# EAGLE board ai_breakout_ws2812b_panel (EAGLE 6.5.0), part 1 of 2
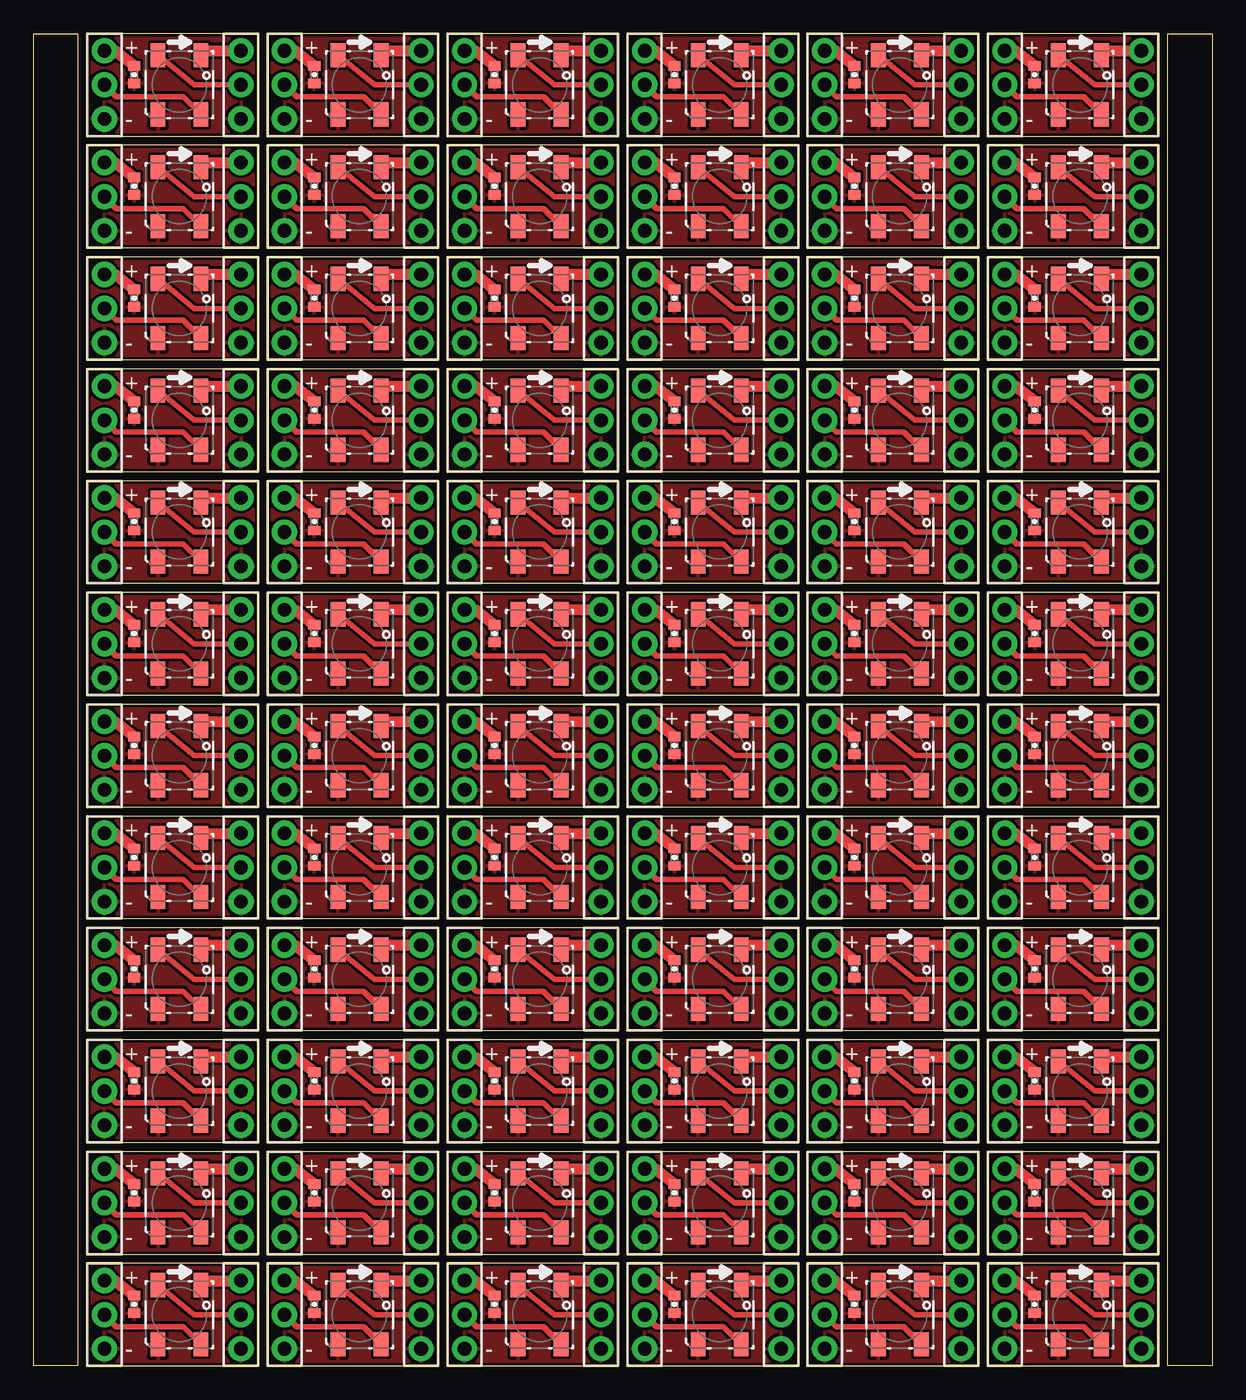
[diagram p0: board, top side]
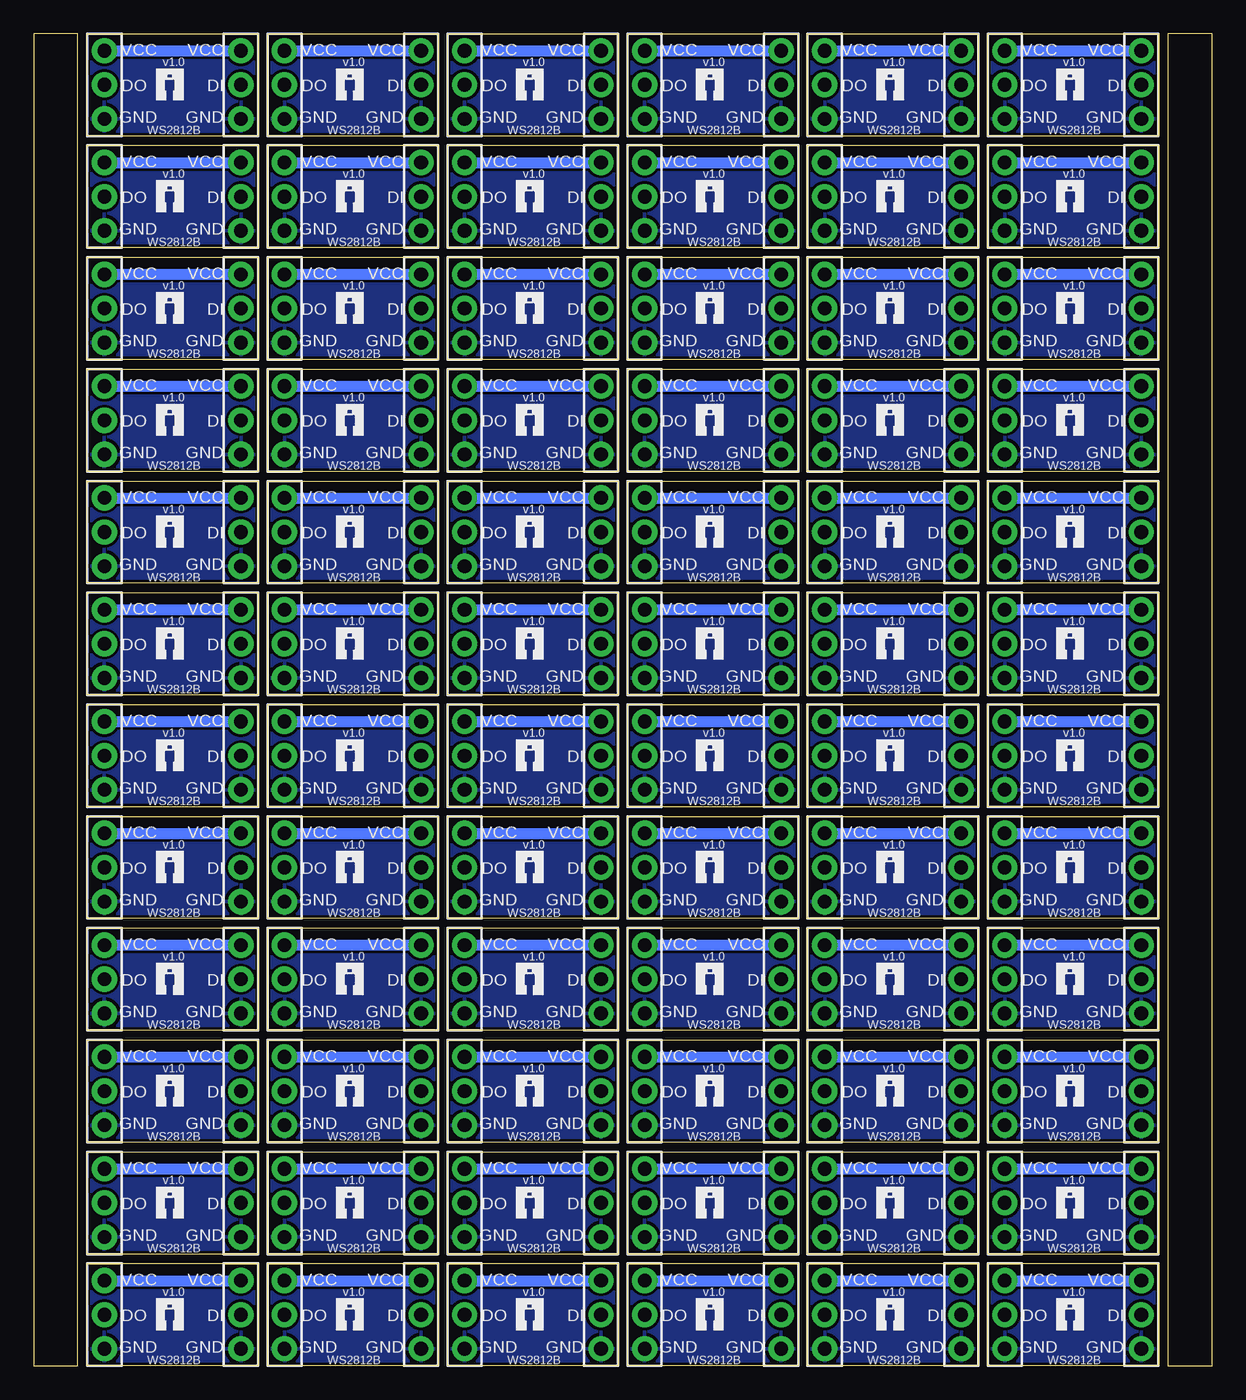
[diagram p1: board, bottom side, seen from below]

Size 87.7 x 99.14 mm. Coordinates in mm from the lower left corner, seen from the top.
Outline: 296 segments
Copper layers (1*16): Top 0.035mm / dielectric 1.5mm / Bottom 0.035mm
Design rules "ai_2layer": minimum track width 7mil, minimum drill 15mil, track to track 8mil, track to pad 8mil, pad to pad 8mil, via to via 8mil, smd to smd 8mil, copper to edge 8mil, drill to drill 8mil, minimum pad ring 12mil, minimum via ring 10mil, stop-mask expansion 4mil, vias tented up to drill 20mil, thermal gap 10mil

## Footprints (pad centres in the part's own frame; a part is rotated, then mirrored left to right if it is on the bottom)
CAP-0402 = smd 0.7 x 0.9: 1 -0.65,0; 2 0.65,0
1X03 = drill 1.016 pad 1.88: 1 -2.54,0; 2 0,0; 3 2.54,0
1X03-NOFIRST = drill 1.016 pad 1.88: 1 -2.54,0; 2 0,0; 3 2.54,0
LED-WS2812B-SM = smd 1.8 x 1.1: 1 -2.2,1.6; 2 -2.2,-1.6; 3 2.2,-1.6; 4 2.2,1.6

## Placement (x,y rotation side)
C1  0.1uF  [CAP-0402]  7.49,4.57 270 top
C2  0.1uF  [CAP-0402]  7.49,12.89 270 top
C3  0.1uF  [CAP-0402]  7.49,21.21 270 top
C4  0.1uF  [CAP-0402]  7.49,29.53 270 top
C5  0.1uF  [CAP-0402]  7.49,37.85 270 top
C6  0.1uF  [CAP-0402]  7.49,46.17 270 top
C7  0.1uF  [CAP-0402]  7.49,54.49 270 top
C8  0.1uF  [CAP-0402]  7.49,62.81 270 top
C9  0.1uF  [CAP-0402]  7.49,71.13 270 top
C10  0.1uF  [CAP-0402]  7.49,79.45 270 top
C11  0.1uF  [CAP-0402]  7.49,87.77 270 top
C12  0.1uF  [CAP-0402]  7.49,96.09 270 top
C13  0.1uF  [CAP-0402]  20.89,4.57 270 top
C14  0.1uF  [CAP-0402]  20.89,12.89 270 top
C15  0.1uF  [CAP-0402]  20.89,21.21 270 top
C16  0.1uF  [CAP-0402]  20.89,29.53 270 top
C17  0.1uF  [CAP-0402]  20.89,37.85 270 top
C18  0.1uF  [CAP-0402]  20.89,46.17 270 top
C19  0.1uF  [CAP-0402]  20.89,54.49 270 top
C20  0.1uF  [CAP-0402]  20.89,62.81 270 top
C21  0.1uF  [CAP-0402]  20.89,71.13 270 top
C22  0.1uF  [CAP-0402]  20.89,79.45 270 top
C23  0.1uF  [CAP-0402]  20.89,87.77 270 top
C24  0.1uF  [CAP-0402]  20.89,96.09 270 top
C25  0.1uF  [CAP-0402]  34.29,4.57 270 top
C26  0.1uF  [CAP-0402]  34.29,12.89 270 top
C27  0.1uF  [CAP-0402]  34.29,21.21 270 top
C28  0.1uF  [CAP-0402]  34.29,29.53 270 top
C29  0.1uF  [CAP-0402]  34.29,37.85 270 top
C30  0.1uF  [CAP-0402]  34.29,46.17 270 top
C31  0.1uF  [CAP-0402]  34.29,54.49 270 top
C32  0.1uF  [CAP-0402]  34.29,62.81 270 top
C33  0.1uF  [CAP-0402]  34.29,71.13 270 top
C34  0.1uF  [CAP-0402]  34.29,79.45 270 top
C35  0.1uF  [CAP-0402]  34.29,87.77 270 top
C36  0.1uF  [CAP-0402]  34.29,96.09 270 top
C37  0.1uF  [CAP-0402]  47.69,4.57 270 top
C38  0.1uF  [CAP-0402]  47.69,12.89 270 top
C39  0.1uF  [CAP-0402]  47.69,21.21 270 top
C40  0.1uF  [CAP-0402]  47.69,29.53 270 top
C41  0.1uF  [CAP-0402]  47.69,37.85 270 top
C42  0.1uF  [CAP-0402]  47.69,46.17 270 top
C43  0.1uF  [CAP-0402]  47.69,54.49 270 top
C44  0.1uF  [CAP-0402]  47.69,62.81 270 top
C45  0.1uF  [CAP-0402]  47.69,71.13 270 top
C46  0.1uF  [CAP-0402]  47.69,79.45 270 top
C47  0.1uF  [CAP-0402]  47.69,87.77 270 top
C48  0.1uF  [CAP-0402]  47.69,96.09 270 top
C49  0.1uF  [CAP-0402]  61.09,4.57 270 top
C50  0.1uF  [CAP-0402]  61.09,12.89 270 top
C51  0.1uF  [CAP-0402]  61.09,21.21 270 top
C52  0.1uF  [CAP-0402]  61.09,29.53 270 top
C53  0.1uF  [CAP-0402]  61.09,37.85 270 top
C54  0.1uF  [CAP-0402]  61.09,46.17 270 top
C55  0.1uF  [CAP-0402]  61.09,54.49 270 top
C56  0.1uF  [CAP-0402]  61.09,62.81 270 top
C57  0.1uF  [CAP-0402]  61.09,71.13 270 top
C58  0.1uF  [CAP-0402]  61.09,79.45 270 top
C59  0.1uF  [CAP-0402]  61.09,87.77 270 top
C60  0.1uF  [CAP-0402]  61.09,96.09 270 top
C61  0.1uF  [CAP-0402]  74.49,4.57 270 top
C62  0.1uF  [CAP-0402]  74.49,12.89 270 top
C63  0.1uF  [CAP-0402]  74.49,21.21 270 top
C64  0.1uF  [CAP-0402]  74.49,29.53 270 top
C65  0.1uF  [CAP-0402]  74.49,37.85 270 top
C66  0.1uF  [CAP-0402]  74.49,46.17 270 top
C67  0.1uF  [CAP-0402]  74.49,54.49 270 top
C68  0.1uF  [CAP-0402]  74.49,62.81 270 top
C69  0.1uF  [CAP-0402]  74.49,71.13 270 top
C70  0.1uF  [CAP-0402]  74.49,79.45 270 top
C71  0.1uF  [CAP-0402]  74.49,87.77 270 top
C72  0.1uF  [CAP-0402]  74.49,96.09 270 top
IN  1X03  [1X03]  5.27,3.81 90 top
IN1  1X03  [1X03]  5.27,12.13 90 top
IN2  1X03  [1X03]  5.27,20.45 90 top
IN3  1X03  [1X03]  5.27,28.77 90 top
IN4  1X03  [1X03]  5.27,37.09 90 top
IN5  1X03  [1X03]  5.27,45.41 90 top
IN6  1X03  [1X03]  5.27,53.73 90 top
IN7  1X03  [1X03]  5.27,62.05 90 top
IN8  1X03  [1X03]  5.27,70.37 90 top
IN9  1X03  [1X03]  5.27,78.69 90 top
IN10  1X03  [1X03]  5.27,87.01 90 top
IN11  1X03  [1X03]  5.27,95.33 90 top
IN12  1X03  [1X03]  18.67,3.81 90 top
IN13  1X03  [1X03]  18.67,12.13 90 top
IN14  1X03  [1X03]  18.67,20.45 90 top
IN15  1X03  [1X03]  18.67,28.77 90 top
IN16  1X03  [1X03]  18.67,37.09 90 top
IN17  1X03  [1X03]  18.67,45.41 90 top
IN18  1X03  [1X03]  18.67,53.73 90 top
IN19  1X03  [1X03]  18.67,62.05 90 top
IN20  1X03  [1X03]  18.67,70.37 90 top
IN21  1X03  [1X03]  18.67,78.69 90 top
IN22  1X03  [1X03]  18.67,87.01 90 top
IN23  1X03  [1X03]  18.67,95.33 90 top
IN24  1X03  [1X03]  32.07,3.81 90 top
IN25  1X03  [1X03]  32.07,12.13 90 top
IN26  1X03  [1X03]  32.07,20.45 90 top
IN27  1X03  [1X03]  32.07,28.77 90 top
IN28  1X03  [1X03]  32.07,37.09 90 top
IN29  1X03  [1X03]  32.07,45.41 90 top
IN30  1X03  [1X03]  32.07,53.73 90 top
IN31  1X03  [1X03]  32.07,62.05 90 top
IN32  1X03  [1X03]  32.07,70.37 90 top
IN33  1X03  [1X03]  32.07,78.69 90 top
IN34  1X03  [1X03]  32.07,87.01 90 top
IN35  1X03  [1X03]  32.07,95.33 90 top
IN36  1X03  [1X03]  45.47,3.81 90 top
IN37  1X03  [1X03]  45.47,12.13 90 top
IN38  1X03  [1X03]  45.47,20.45 90 top
IN39  1X03  [1X03]  45.47,28.77 90 top
IN40  1X03  [1X03]  45.47,37.09 90 top
IN41  1X03  [1X03]  45.47,45.41 90 top
IN42  1X03  [1X03]  45.47,53.73 90 top
IN43  1X03  [1X03]  45.47,62.05 90 top
IN44  1X03  [1X03]  45.47,70.37 90 top
IN45  1X03  [1X03]  45.47,78.69 90 top
IN46  1X03  [1X03]  45.47,87.01 90 top
IN47  1X03  [1X03]  45.47,95.33 90 top
IN48  1X03  [1X03]  58.87,3.81 90 top
IN49  1X03  [1X03]  58.87,12.13 90 top
IN50  1X03  [1X03]  58.87,20.45 90 top
IN51  1X03  [1X03]  58.87,28.77 90 top
IN52  1X03  [1X03]  58.87,37.09 90 top
IN53  1X03  [1X03]  58.87,45.41 90 top
IN54  1X03  [1X03]  58.87,53.73 90 top
IN55  1X03  [1X03]  58.87,62.05 90 top
IN56  1X03  [1X03]  58.87,70.37 90 top
IN57  1X03  [1X03]  58.87,78.69 90 top
IN58  1X03  [1X03]  58.87,87.01 90 top
IN59  1X03  [1X03]  58.87,95.33 90 top
IN60  1X03  [1X03]  72.27,3.81 90 top
IN61  1X03  [1X03]  72.27,12.13 90 top
IN62  1X03  [1X03]  72.27,20.45 90 top
IN63  1X03  [1X03]  72.27,28.77 90 top
IN64  1X03  [1X03]  72.27,37.09 90 top
IN65  1X03  [1X03]  72.27,45.41 90 top
IN66  1X03  [1X03]  72.27,53.73 90 top
IN67  1X03  [1X03]  72.27,62.05 90 top
IN68  1X03  [1X03]  72.27,70.37 90 top
IN69  1X03  [1X03]  72.27,78.69 90 top
IN70  1X03  [1X03]  72.27,87.01 90 top
IN71  1X03  [1X03]  72.27,95.33 90 top
OUT  1X03NOFIRST  [1X03-NOFIRST]  15.43,3.81 90 top
OUT1  1X03NOFIRST  [1X03-NOFIRST]  15.43,12.13 90 top
OUT2  1X03NOFIRST  [1X03-NOFIRST]  15.43,20.45 90 top
OUT3  1X03NOFIRST  [1X03-NOFIRST]  15.43,28.77 90 top
OUT4  1X03NOFIRST  [1X03-NOFIRST]  15.43,37.09 90 top
OUT5  1X03NOFIRST  [1X03-NOFIRST]  15.43,45.41 90 top
OUT6  1X03NOFIRST  [1X03-NOFIRST]  15.43,53.73 90 top
OUT7  1X03NOFIRST  [1X03-NOFIRST]  15.43,62.05 90 top
OUT8  1X03NOFIRST  [1X03-NOFIRST]  15.43,70.37 90 top
OUT9  1X03NOFIRST  [1X03-NOFIRST]  15.43,78.69 90 top
OUT10  1X03NOFIRST  [1X03-NOFIRST]  15.43,87.01 90 top
OUT11  1X03NOFIRST  [1X03-NOFIRST]  15.43,95.33 90 top
OUT12  1X03NOFIRST  [1X03-NOFIRST]  28.83,3.81 90 top
OUT13  1X03NOFIRST  [1X03-NOFIRST]  28.83,12.13 90 top
OUT14  1X03NOFIRST  [1X03-NOFIRST]  28.83,20.45 90 top
OUT15  1X03NOFIRST  [1X03-NOFIRST]  28.83,28.77 90 top
OUT16  1X03NOFIRST  [1X03-NOFIRST]  28.83,37.09 90 top
OUT17  1X03NOFIRST  [1X03-NOFIRST]  28.83,45.41 90 top
OUT18  1X03NOFIRST  [1X03-NOFIRST]  28.83,53.73 90 top
OUT19  1X03NOFIRST  [1X03-NOFIRST]  28.83,62.05 90 top
OUT20  1X03NOFIRST  [1X03-NOFIRST]  28.83,70.37 90 top
OUT21  1X03NOFIRST  [1X03-NOFIRST]  28.83,78.69 90 top
OUT22  1X03NOFIRST  [1X03-NOFIRST]  28.83,87.01 90 top
OUT23  1X03NOFIRST  [1X03-NOFIRST]  28.83,95.33 90 top
OUT24  1X03NOFIRST  [1X03-NOFIRST]  42.23,3.81 90 top
OUT25  1X03NOFIRST  [1X03-NOFIRST]  42.23,12.13 90 top
OUT26  1X03NOFIRST  [1X03-NOFIRST]  42.23,20.45 90 top
OUT27  1X03NOFIRST  [1X03-NOFIRST]  42.23,28.77 90 top
OUT28  1X03NOFIRST  [1X03-NOFIRST]  42.23,37.09 90 top
OUT29  1X03NOFIRST  [1X03-NOFIRST]  42.23,45.41 90 top
OUT30  1X03NOFIRST  [1X03-NOFIRST]  42.23,53.73 90 top
OUT31  1X03NOFIRST  [1X03-NOFIRST]  42.23,62.05 90 top
OUT32  1X03NOFIRST  [1X03-NOFIRST]  42.23,70.37 90 top
OUT33  1X03NOFIRST  [1X03-NOFIRST]  42.23,78.69 90 top
OUT34  1X03NOFIRST  [1X03-NOFIRST]  42.23,87.01 90 top
OUT35  1X03NOFIRST  [1X03-NOFIRST]  42.23,95.33 90 top
OUT36  1X03NOFIRST  [1X03-NOFIRST]  55.63,3.81 90 top
OUT37  1X03NOFIRST  [1X03-NOFIRST]  55.63,12.13 90 top
OUT38  1X03NOFIRST  [1X03-NOFIRST]  55.63,20.45 90 top
OUT39  1X03NOFIRST  [1X03-NOFIRST]  55.63,28.77 90 top
OUT40  1X03NOFIRST  [1X03-NOFIRST]  55.63,37.09 90 top
OUT41  1X03NOFIRST  [1X03-NOFIRST]  55.63,45.41 90 top
OUT42  1X03NOFIRST  [1X03-NOFIRST]  55.63,53.73 90 top
OUT43  1X03NOFIRST  [1X03-NOFIRST]  55.63,62.05 90 top
OUT44  1X03NOFIRST  [1X03-NOFIRST]  55.63,70.37 90 top
OUT45  1X03NOFIRST  [1X03-NOFIRST]  55.63,78.69 90 top
OUT46  1X03NOFIRST  [1X03-NOFIRST]  55.63,87.01 90 top
OUT47  1X03NOFIRST  [1X03-NOFIRST]  55.63,95.33 90 top
OUT48  1X03NOFIRST  [1X03-NOFIRST]  69.03,3.81 90 top
OUT49  1X03NOFIRST  [1X03-NOFIRST]  69.03,12.13 90 top
OUT50  1X03NOFIRST  [1X03-NOFIRST]  69.03,20.45 90 top
OUT51  1X03NOFIRST  [1X03-NOFIRST]  69.03,28.77 90 top
OUT52  1X03NOFIRST  [1X03-NOFIRST]  69.03,37.09 90 top
OUT53  1X03NOFIRST  [1X03-NOFIRST]  69.03,45.41 90 top
OUT54  1X03NOFIRST  [1X03-NOFIRST]  69.03,53.73 90 top
OUT55  1X03NOFIRST  [1X03-NOFIRST]  69.03,62.05 90 top
OUT56  1X03NOFIRST  [1X03-NOFIRST]  69.03,70.37 90 top
OUT57  1X03NOFIRST  [1X03-NOFIRST]  69.03,78.69 90 top
OUT58  1X03NOFIRST  [1X03-NOFIRST]  69.03,87.01 90 top
OUT59  1X03NOFIRST  [1X03-NOFIRST]  69.03,95.33 90 top
OUT60  1X03NOFIRST  [1X03-NOFIRST]  82.43,3.81 90 top
OUT61  1X03NOFIRST  [1X03-NOFIRST]  82.43,12.13 90 top
OUT62  1X03NOFIRST  [1X03-NOFIRST]  82.43,20.45 90 top
OUT63  1X03NOFIRST  [1X03-NOFIRST]  82.43,28.77 90 top
OUT64  1X03NOFIRST  [1X03-NOFIRST]  82.43,37.09 90 top
OUT65  1X03NOFIRST  [1X03-NOFIRST]  82.43,45.41 90 top
OUT66  1X03NOFIRST  [1X03-NOFIRST]  82.43,53.73 90 top
OUT67  1X03NOFIRST  [1X03-NOFIRST]  82.43,62.05 90 top
OUT68  1X03NOFIRST  [1X03-NOFIRST]  82.43,70.37 90 top
OUT69  1X03NOFIRST  [1X03-NOFIRST]  82.43,78.69 90 top
OUT70  1X03NOFIRST  [1X03-NOFIRST]  82.43,87.01 90 top
OUT71  1X03NOFIRST  [1X03-NOFIRST]  82.43,95.33 90 top
RGB  LED-WS2812B-SM  [LED-WS2812B-SM]  10.86,3.81 270 top
RGB1  LED-WS2812B-SM  [LED-WS2812B-SM]  10.86,12.13 270 top
RGB2  LED-WS2812B-SM  [LED-WS2812B-SM]  10.86,20.45 270 top
RGB3  LED-WS2812B-SM  [LED-WS2812B-SM]  10.86,28.77 270 top
RGB4  LED-WS2812B-SM  [LED-WS2812B-SM]  10.86,37.09 270 top
RGB5  LED-WS2812B-SM  [LED-WS2812B-SM]  10.86,45.41 270 top
RGB6  LED-WS2812B-SM  [LED-WS2812B-SM]  10.86,53.73 270 top
RGB7  LED-WS2812B-SM  [LED-WS2812B-SM]  10.86,62.05 270 top
RGB8  LED-WS2812B-SM  [LED-WS2812B-SM]  10.86,70.37 270 top
RGB9  LED-WS2812B-SM  [LED-WS2812B-SM]  10.86,78.69 270 top
RGB10  LED-WS2812B-SM  [LED-WS2812B-SM]  10.86,87.01 270 top
RGB11  LED-WS2812B-SM  [LED-WS2812B-SM]  10.86,95.33 270 top
RGB12  LED-WS2812B-SM  [LED-WS2812B-SM]  24.26,3.81 270 top
RGB13  LED-WS2812B-SM  [LED-WS2812B-SM]  24.26,12.13 270 top
RGB14  LED-WS2812B-SM  [LED-WS2812B-SM]  24.26,20.45 270 top
RGB15  LED-WS2812B-SM  [LED-WS2812B-SM]  24.26,28.77 270 top
RGB16  LED-WS2812B-SM  [LED-WS2812B-SM]  24.26,37.09 270 top
RGB17  LED-WS2812B-SM  [LED-WS2812B-SM]  24.26,45.41 270 top
RGB18  LED-WS2812B-SM  [LED-WS2812B-SM]  24.26,53.73 270 top
RGB19  LED-WS2812B-SM  [LED-WS2812B-SM]  24.26,62.05 270 top
RGB20  LED-WS2812B-SM  [LED-WS2812B-SM]  24.26,70.37 270 top
RGB21  LED-WS2812B-SM  [LED-WS2812B-SM]  24.26,78.69 270 top
RGB22  LED-WS2812B-SM  [LED-WS2812B-SM]  24.26,87.01 270 top
RGB23  LED-WS2812B-SM  [LED-WS2812B-SM]  24.26,95.33 270 top
RGB24  LED-WS2812B-SM  [LED-WS2812B-SM]  37.66,3.81 270 top
RGB25  LED-WS2812B-SM  [LED-WS2812B-SM]  37.66,12.13 270 top
RGB26  LED-WS2812B-SM  [LED-WS2812B-SM]  37.66,20.45 270 top
RGB27  LED-WS2812B-SM  [LED-WS2812B-SM]  37.66,28.77 270 top
RGB28  LED-WS2812B-SM  [LED-WS2812B-SM]  37.66,37.09 270 top
RGB29  LED-WS2812B-SM  [LED-WS2812B-SM]  37.66,45.41 270 top
RGB30  LED-WS2812B-SM  [LED-WS2812B-SM]  37.66,53.73 270 top
RGB31  LED-WS2812B-SM  [LED-WS2812B-SM]  37.66,62.05 270 top
RGB32  LED-WS2812B-SM  [LED-WS2812B-SM]  37.66,70.37 270 top
RGB33  LED-WS2812B-SM  [LED-WS2812B-SM]  37.66,78.69 270 top
RGB34  LED-WS2812B-SM  [LED-WS2812B-SM]  37.66,87.01 270 top
RGB35  LED-WS2812B-SM  [LED-WS2812B-SM]  37.66,95.33 270 top
RGB36  LED-WS2812B-SM  [LED-WS2812B-SM]  51.06,3.81 270 top
RGB37  LED-WS2812B-SM  [LED-WS2812B-SM]  51.06,12.13 270 top
RGB38  LED-WS2812B-SM  [LED-WS2812B-SM]  51.06,20.45 270 top
RGB39  LED-WS2812B-SM  [LED-WS2812B-SM]  51.06,28.77 270 top
RGB40  LED-WS2812B-SM  [LED-WS2812B-SM]  51.06,37.09 270 top
RGB41  LED-WS2812B-SM  [LED-WS2812B-SM]  51.06,45.41 270 top
RGB42  LED-WS2812B-SM  [LED-WS2812B-SM]  51.06,53.73 270 top
RGB43  LED-WS2812B-SM  [LED-WS2812B-SM]  51.06,62.05 270 top
RGB44  LED-WS2812B-SM  [LED-WS2812B-SM]  51.06,70.37 270 top
RGB45  LED-WS2812B-SM  [LED-WS2812B-SM]  51.06,78.69 270 top
RGB46  LED-WS2812B-SM  [LED-WS2812B-SM]  51.06,87.01 270 top
RGB47  LED-WS2812B-SM  [LED-WS2812B-SM]  51.06,95.33 270 top
RGB48  LED-WS2812B-SM  [LED-WS2812B-SM]  64.46,3.81 270 top
RGB49  LED-WS2812B-SM  [LED-WS2812B-SM]  64.46,12.13 270 top
RGB50  LED-WS2812B-SM  [LED-WS2812B-SM]  64.46,20.45 270 top
RGB51  LED-WS2812B-SM  [LED-WS2812B-SM]  64.46,28.77 270 top
RGB52  LED-WS2812B-SM  [LED-WS2812B-SM]  64.46,37.09 270 top
RGB53  LED-WS2812B-SM  [LED-WS2812B-SM]  64.46,45.41 270 top
RGB54  LED-WS2812B-SM  [LED-WS2812B-SM]  64.46,53.73 270 top
RGB55  LED-WS2812B-SM  [LED-WS2812B-SM]  64.46,62.05 270 top
RGB56  LED-WS2812B-SM  [LED-WS2812B-SM]  64.46,70.37 270 top
RGB57  LED-WS2812B-SM  [LED-WS2812B-SM]  64.46,78.69 270 top
RGB58  LED-WS2812B-SM  [LED-WS2812B-SM]  64.46,87.01 270 top
RGB59  LED-WS2812B-SM  [LED-WS2812B-SM]  64.46,95.33 270 top
RGB60  LED-WS2812B-SM  [LED-WS2812B-SM]  77.86,3.81 270 top
RGB61  LED-WS2812B-SM  [LED-WS2812B-SM]  77.86,12.13 270 top
RGB62  LED-WS2812B-SM  [LED-WS2812B-SM]  77.86,20.45 270 top
RGB63  LED-WS2812B-SM  [LED-WS2812B-SM]  77.86,28.77 270 top
RGB64  LED-WS2812B-SM  [LED-WS2812B-SM]  77.86,37.09 270 top
RGB65  LED-WS2812B-SM  [LED-WS2812B-SM]  77.86,45.41 270 top
RGB66  LED-WS2812B-SM  [LED-WS2812B-SM]  77.86,53.73 270 top
RGB67  LED-WS2812B-SM  [LED-WS2812B-SM]  77.86,62.05 270 top
RGB68  LED-WS2812B-SM  [LED-WS2812B-SM]  77.86,70.37 270 top
RGB69  LED-WS2812B-SM  [LED-WS2812B-SM]  77.86,78.69 270 top
RGB70  LED-WS2812B-SM  [LED-WS2812B-SM]  77.86,87.01 270 top
RGB71  LED-WS2812B-SM  [LED-WS2812B-SM]  77.86,95.33 270 top
U$1  [AI-LOGO-XS]  11.56,10.99 0 bottom
U$2  [AI-LOGO-XS]  11.56,19.31 0 bottom
U$3  [AI-LOGO-XS]  11.56,27.63 0 bottom
U$4  [AI-LOGO-XS]  11.56,35.95 0 bottom
U$5  [AI-LOGO-XS]  11.56,2.67 0 bottom
U$6  [AI-LOGO-XS]  11.56,44.27 0 bottom
U$7  [AI-LOGO-XS]  11.56,52.59 0 bottom
U$8  [AI-LOGO-XS]  11.56,60.91 0 bottom
U$9  [AI-LOGO-XS]  11.56,69.23 0 bottom
U$10  [AI-LOGO-XS]  11.56,77.55 0 bottom
U$11  [AI-LOGO-XS]  11.56,85.87 0 bottom
U$12  [AI-LOGO-XS]  11.56,94.19 0 bottom
U$13  [AI-LOGO-XS]  24.96,2.67 0 bottom
U$14  [AI-LOGO-XS]  24.96,10.99 0 bottom
U$15  [AI-LOGO-XS]  24.96,19.31 0 bottom
U$16  [AI-LOGO-XS]  24.96,27.63 0 bottom
U$17  [AI-LOGO-XS]  24.96,35.95 0 bottom
U$18  [AI-LOGO-XS]  24.96,44.27 0 bottom
U$19  [AI-LOGO-XS]  24.96,52.59 0 bottom
U$20  [AI-LOGO-XS]  24.96,60.91 0 bottom
U$21  [AI-LOGO-XS]  24.96,69.23 0 bottom
U$22  [AI-LOGO-XS]  24.96,77.55 0 bottom
U$23  [AI-LOGO-XS]  24.96,85.87 0 bottom
U$24  [AI-LOGO-XS]  24.96,94.19 0 bottom
U$25  [AI-LOGO-XS]  38.36,2.67 0 bottom
U$26  [AI-LOGO-XS]  38.36,10.99 0 bottom
U$27  [AI-LOGO-XS]  38.36,19.31 0 bottom
U$28  [AI-LOGO-XS]  38.36,27.63 0 bottom
U$29  [AI-LOGO-XS]  38.36,35.95 0 bottom
U$30  [AI-LOGO-XS]  38.36,44.27 0 bottom
U$31  [AI-LOGO-XS]  38.36,52.59 0 bottom
U$32  [AI-LOGO-XS]  38.36,60.91 0 bottom
U$33  [AI-LOGO-XS]  38.36,69.23 0 bottom
U$34  [AI-LOGO-XS]  38.36,77.55 0 bottom
U$35  [AI-LOGO-XS]  38.36,85.87 0 bottom
U$36  [AI-LOGO-XS]  38.36,94.19 0 bottom
U$37  [AI-LOGO-XS]  51.76,2.67 0 bottom
U$38  [AI-LOGO-XS]  51.76,10.99 0 bottom
U$39  [AI-LOGO-XS]  51.76,19.31 0 bottom
U$40  [AI-LOGO-XS]  51.76,27.63 0 bottom
U$41  [AI-LOGO-XS]  51.76,35.95 0 bottom
U$42  [AI-LOGO-XS]  51.76,44.27 0 bottom
U$43  [AI-LOGO-XS]  51.76,52.59 0 bottom
U$44  [AI-LOGO-XS]  51.76,60.91 0 bottom
U$45  [AI-LOGO-XS]  51.76,69.23 0 bottom
U$46  [AI-LOGO-XS]  51.76,77.55 0 bottom
U$47  [AI-LOGO-XS]  51.76,85.87 0 bottom
U$48  [AI-LOGO-XS]  51.76,94.19 0 bottom
U$49  [AI-LOGO-XS]  65.16,2.67 0 bottom
U$50  [AI-LOGO-XS]  65.16,10.99 0 bottom
U$51  [AI-LOGO-XS]  65.16,19.31 0 bottom
U$52  [AI-LOGO-XS]  65.16,27.63 0 bottom
U$53  [AI-LOGO-XS]  65.16,35.95 0 bottom
U$54  [AI-LOGO-XS]  65.16,44.27 0 bottom
U$55  [AI-LOGO-XS]  65.16,52.59 0 bottom
U$56  [AI-LOGO-XS]  65.16,60.91 0 bottom
U$57  [AI-LOGO-XS]  65.16,69.23 0 bottom
U$58  [AI-LOGO-XS]  65.16,77.55 0 bottom
U$59  [AI-LOGO-XS]  65.16,85.87 0 bottom
U$60  [AI-LOGO-XS]  65.16,94.19 0 bottom
U$61  [AI-LOGO-XS]  78.56,2.67 0 bottom
U$62  [AI-LOGO-XS]  78.56,10.99 0 bottom
U$63  [AI-LOGO-XS]  78.56,19.31 0 bottom
U$64  [AI-LOGO-XS]  78.56,27.63 0 bottom
U$65  [AI-LOGO-XS]  78.56,35.95 0 bottom
U$66  [AI-LOGO-XS]  78.56,44.27 0 bottom
U$67  [AI-LOGO-XS]  78.56,52.59 0 bottom
U$68  [AI-LOGO-XS]  78.56,60.91 0 bottom
U$69  [AI-LOGO-XS]  78.56,69.23 0 bottom
U$70  [AI-LOGO-XS]  78.56,77.55 0 bottom
U$71  [AI-LOGO-XS]  78.56,85.87 0 bottom
U$72  [AI-LOGO-XS]  78.56,94.19 0 bottom

## Library data of the parts
C1-C72 = Ai_Passives
IN IN1-IN71 OUT OUT1-OUT71 = Ai_Connectors
RGB RGB1-RGB71 = Ai_LED
U$1-U$72 = Ai_Miscellany

## Nets
DI: IN.2 RGB.4
DI1: IN1.2 RGB1.4
DI2: IN2.2 RGB2.4
DI3: IN3.2 RGB3.4
DI4: IN4.2 RGB4.4
DI5: IN5.2 RGB5.4
DI6: IN6.2 RGB6.4
DI7: IN7.2 RGB7.4
DI8: IN8.2 RGB8.4
DI9: IN9.2 RGB9.4
DI10: IN10.2 RGB10.4
DI11: IN11.2 RGB11.4
DI12: IN12.2 RGB12.4
DI13: IN13.2 RGB13.4
DI14: IN14.2 RGB14.4
DI15: IN15.2 RGB15.4
DI16: IN16.2 RGB16.4
DI17: IN17.2 RGB17.4
DI18: IN18.2 RGB18.4
DI19: IN19.2 RGB19.4
DI20: IN20.2 RGB20.4
DI21: IN21.2 RGB21.4
DI22: IN22.2 RGB22.4
DI23: IN23.2 RGB23.4
DI24: IN24.2 RGB24.4
DI25: IN25.2 RGB25.4
DI26: IN26.2 RGB26.4
DI27: IN27.2 RGB27.4
DI28: IN28.2 RGB28.4
DI29: IN29.2 RGB29.4
DI30: IN30.2 RGB30.4
DI31: IN31.2 RGB31.4
DI32: IN32.2 RGB32.4
DI33: IN33.2 RGB33.4
DI34: IN34.2 RGB34.4
DI35: IN35.2 RGB35.4
DI36: IN36.2 RGB36.4
DI37: IN37.2 RGB37.4
DI38: IN38.2 RGB38.4
DI39: IN39.2 RGB39.4
DI40: IN40.2 RGB40.4
DI41: IN41.2 RGB41.4
DI42: IN42.2 RGB42.4
DI43: IN43.2 RGB43.4
DI44: IN44.2 RGB44.4
DI45: IN45.2 RGB45.4
DI46: IN46.2 RGB46.4
DI47: IN47.2 RGB47.4
DI48: IN48.2 RGB48.4
DI49: IN49.2 RGB49.4
DI50: IN50.2 RGB50.4
DI51: IN51.2 RGB51.4
DI52: IN52.2 RGB52.4
DI53: IN53.2 RGB53.4
DI54: IN54.2 RGB54.4
DI55: IN55.2 RGB55.4
DI56: IN56.2 RGB56.4
DI57: IN57.2 RGB57.4
DI58: IN58.2 RGB58.4
DI59: IN59.2 RGB59.4
DI60: IN60.2 RGB60.4
DI61: IN61.2 RGB61.4
DI62: IN62.2 RGB62.4
DI63: IN63.2 RGB63.4
DI64: IN64.2 RGB64.4
DI65: IN65.2 RGB65.4
DI66: IN66.2 RGB66.4
DI67: IN67.2 RGB67.4
DI68: IN68.2 RGB68.4
DI69: IN69.2 RGB69.4
DI70: IN70.2 RGB70.4
DI71: IN71.2 RGB71.4
DO: OUT.2 RGB.2
DO1: OUT1.2 RGB1.2
DO2: OUT2.2 RGB2.2
DO3: OUT3.2 RGB3.2
DO4: OUT4.2 RGB4.2
DO5: OUT5.2 RGB5.2
DO6: OUT6.2 RGB6.2
DO7: OUT7.2 RGB7.2
DO8: OUT8.2 RGB8.2
DO9: OUT9.2 RGB9.2
DO10: OUT10.2 RGB10.2
DO11: OUT11.2 RGB11.2
DO12: OUT12.2 RGB12.2
DO13: OUT13.2 RGB13.2
DO14: OUT14.2 RGB14.2
DO15: OUT15.2 RGB15.2
DO16: OUT16.2 RGB16.2
DO17: OUT17.2 RGB17.2
DO18: OUT18.2 RGB18.2
DO19: OUT19.2 RGB19.2
DO20: OUT20.2 RGB20.2
DO21: OUT21.2 RGB21.2
DO22: OUT22.2 RGB22.2
DO23: OUT23.2 RGB23.2
DO24: OUT24.2 RGB24.2
DO25: OUT25.2 RGB25.2
DO26: OUT26.2 RGB26.2
DO27: OUT27.2 RGB27.2
DO28: OUT28.2 RGB28.2
DO29: OUT29.2 RGB29.2
DO30: OUT30.2 RGB30.2
DO31: OUT31.2 RGB31.2
DO32: OUT32.2 RGB32.2
DO33: OUT33.2 RGB33.2
DO34: OUT34.2 RGB34.2
DO35: OUT35.2 RGB35.2
DO36: OUT36.2 RGB36.2
DO37: OUT37.2 RGB37.2
DO38: OUT38.2 RGB38.2
DO39: OUT39.2 RGB39.2
DO40: OUT40.2 RGB40.2
DO41: OUT41.2 RGB41.2
DO42: OUT42.2 RGB42.2
DO43: OUT43.2 RGB43.2
DO44: OUT44.2 RGB44.2
DO45: OUT45.2 RGB45.2
DO46: OUT46.2 RGB46.2
DO47: OUT47.2 RGB47.2
DO48: OUT48.2 RGB48.2
DO49: OUT49.2 RGB49.2
DO50: OUT50.2 RGB50.2
DO51: OUT51.2 RGB51.2
DO52: OUT52.2 RGB52.2
DO53: OUT53.2 RGB53.2
DO54: OUT54.2 RGB54.2
DO55: OUT55.2 RGB55.2
DO56: OUT56.2 RGB56.2
DO57: OUT57.2 RGB57.2
DO58: OUT58.2 RGB58.2
DO59: OUT59.2 RGB59.2
DO60: OUT60.2 RGB60.2
DO61: OUT61.2 RGB61.2
DO62: OUT62.2 RGB62.2
DO63: OUT63.2 RGB63.2
DO64: OUT64.2 RGB64.2
DO65: OUT65.2 RGB65.2
DO66: OUT66.2 RGB66.2
DO67: OUT67.2 RGB67.2
DO68: OUT68.2 RGB68.2
DO69: OUT69.2 RGB69.2
DO70: OUT70.2 RGB70.2
DO71: OUT71.2 RGB71.2
GND: C1.2 IN.1 OUT.1 RGB.3
GND1: C2.2 IN1.1 OUT1.1 RGB1.3
GND2: C3.2 IN2.1 OUT2.1 RGB2.3
GND3: C4.2 IN3.1 OUT3.1 RGB3.3
GND4: C5.2 IN4.1 OUT4.1 RGB4.3
GND5: C6.2 IN5.1 OUT5.1 RGB5.3
GND6: C7.2 IN6.1 OUT6.1 RGB6.3
GND7: C8.2 IN7.1 OUT7.1 RGB7.3
GND8: C9.2 IN8.1 OUT8.1 RGB8.3
GND9: C10.2 IN9.1 OUT9.1 RGB9.3
GND10: C11.2 IN10.1 OUT10.1 RGB10.3
GND11: C12.2 IN11.1 OUT11.1 RGB11.3
GND12: C13.2 IN12.1 OUT12.1 RGB12.3
GND13: C14.2 IN13.1 OUT13.1 RGB13.3
GND14: C15.2 IN14.1 OUT14.1 RGB14.3
GND15: C16.2 IN15.1 OUT15.1 RGB15.3
GND16: C17.2 IN16.1 OUT16.1 RGB16.3
GND17: C18.2 IN17.1 OUT17.1 RGB17.3
GND18: C19.2 IN18.1 OUT18.1 RGB18.3
GND19: C20.2 IN19.1 OUT19.1 RGB19.3
GND20: C21.2 IN20.1 OUT20.1 RGB20.3
GND21: C22.2 IN21.1 OUT21.1 RGB21.3
GND22: C23.2 IN22.1 OUT22.1 RGB22.3
GND23: C24.2 IN23.1 OUT23.1 RGB23.3
GND24: C25.2 IN24.1 OUT24.1 RGB24.3
GND25: C26.2 IN25.1 OUT25.1 RGB25.3
GND26: C27.2 IN26.1 OUT26.1 RGB26.3
GND27: C28.2 IN27.1 OUT27.1 RGB27.3
GND28: C29.2 IN28.1 OUT28.1 RGB28.3
GND29: C30.2 IN29.1 OUT29.1 RGB29.3
GND30: C31.2 IN30.1 OUT30.1 RGB30.3
GND31: C32.2 IN31.1 OUT31.1 RGB31.3
GND32: C33.2 IN32.1 OUT32.1 RGB32.3
GND33: C34.2 IN33.1 OUT33.1 RGB33.3
GND34: C35.2 IN34.1 OUT34.1 RGB34.3
GND35: C36.2 IN35.1 OUT35.1 RGB35.3
GND36: C37.2 IN36.1 OUT36.1 RGB36.3
GND37: C38.2 IN37.1 OUT37.1 RGB37.3
GND38: C39.2 IN38.1 OUT38.1 RGB38.3
GND39: C40.2 IN39.1 OUT39.1 RGB39.3
GND40: C41.2 IN40.1 OUT40.1 RGB40.3
GND41: C42.2 IN41.1 OUT41.1 RGB41.3
GND42: C43.2 IN42.1 OUT42.1 RGB42.3
GND43: C44.2 IN43.1 OUT43.1 RGB43.3
GND44: C45.2 IN44.1 OUT44.1 RGB44.3
GND45: C46.2 IN45.1 OUT45.1 RGB45.3
GND46: C47.2 IN46.1 OUT46.1 RGB46.3
GND47: C48.2 IN47.1 OUT47.1 RGB47.3
GND48: C49.2 IN48.1 OUT48.1 RGB48.3
GND49: C50.2 IN49.1 OUT49.1 RGB49.3
GND50: C51.2 IN50.1 OUT50.1 RGB50.3
GND51: C52.2 IN51.1 OUT51.1 RGB51.3
GND52: C53.2 IN52.1 OUT52.1 RGB52.3
GND53: C54.2 IN53.1 OUT53.1 RGB53.3
GND54: C55.2 IN54.1 OUT54.1 RGB54.3
GND55: C56.2 IN55.1 OUT55.1 RGB55.3
GND56: C57.2 IN56.1 OUT56.1 RGB56.3
GND57: C58.2 IN57.1 OUT57.1 RGB57.3
GND58: C59.2 IN58.1 OUT58.1 RGB58.3
GND59: C60.2 IN59.1 OUT59.1 RGB59.3
GND60: C61.2 IN60.1 OUT60.1 RGB60.3
GND61: C62.2 IN61.1 OUT61.1 RGB61.3
GND62: C63.2 IN62.1 OUT62.1 RGB62.3
GND63: C64.2 IN63.1 OUT63.1 RGB63.3
GND64: C65.2 IN64.1 OUT64.1 RGB64.3
GND65: C66.2 IN65.1 OUT65.1 RGB65.3
GND66: C67.2 IN66.1 OUT66.1 RGB66.3
GND67: C68.2 IN67.1 OUT67.1 RGB67.3
GND68: C69.2 IN68.1 OUT68.1 RGB68.3
GND69: C70.2 IN69.1 OUT69.1 RGB69.3
GND70: C71.2 IN70.1 OUT70.1 RGB70.3
GND71: C72.2 IN71.1 OUT71.1 RGB71.3
VCC: C1.1 IN.3 OUT.3 RGB.1
VCC1: C2.1 IN1.3 OUT1.3 RGB1.1
VCC2: C3.1 IN2.3 OUT2.3 RGB2.1
VCC3: C4.1 IN3.3 OUT3.3 RGB3.1
VCC4: C5.1 IN4.3 OUT4.3 RGB4.1
VCC5: C6.1 IN5.3 OUT5.3 RGB5.1
VCC6: C7.1 IN6.3 OUT6.3 RGB6.1
VCC7: C8.1 IN7.3 OUT7.3 RGB7.1
VCC8: C9.1 IN8.3 OUT8.3 RGB8.1
VCC9: C10.1 IN9.3 OUT9.3 RGB9.1
VCC10: C11.1 IN10.3 OUT10.3 RGB10.1
VCC11: C12.1 IN11.3 OUT11.3 RGB11.1
VCC12: C13.1 IN12.3 OUT12.3 RGB12.1
VCC13: C14.1 IN13.3 OUT13.3 RGB13.1
VCC14: C15.1 IN14.3 OUT14.3 RGB14.1
VCC15: C16.1 IN15.3 OUT15.3 RGB15.1
VCC16: C17.1 IN16.3 OUT16.3 RGB16.1
VCC17: C18.1 IN17.3 OUT17.3 RGB17.1
VCC18: C19.1 IN18.3 OUT18.3 RGB18.1
VCC19: C20.1 IN19.3 OUT19.3 RGB19.1
VCC20: C21.1 IN20.3 OUT20.3 RGB20.1
VCC21: C22.1 IN21.3 OUT21.3 RGB21.1
VCC22: C23.1 IN22.3 OUT22.3 RGB22.1
VCC23: C24.1 IN23.3 OUT23.3 RGB23.1
VCC24: C25.1 IN24.3 OUT24.3 RGB24.1
VCC25: C26.1 IN25.3 OUT25.3 RGB25.1
VCC26: C27.1 IN26.3 OUT26.3 RGB26.1
VCC27: C28.1 IN27.3 OUT27.3 RGB27.1
VCC28: C29.1 IN28.3 OUT28.3 RGB28.1
VCC29: C30.1 IN29.3 OUT29.3 RGB29.1
VCC30: C31.1 IN30.3 OUT30.3 RGB30.1
VCC31: C32.1 IN31.3 OUT31.3 RGB31.1
VCC32: C33.1 IN32.3 OUT32.3 RGB32.1
VCC33: C34.1 IN33.3 OUT33.3 RGB33.1
VCC34: C35.1 IN34.3 OUT34.3 RGB34.1
VCC35: C36.1 IN35.3 OUT35.3 RGB35.1
VCC36: C37.1 IN36.3 OUT36.3 RGB36.1
VCC37: C38.1 IN37.3 OUT37.3 RGB37.1
VCC38: C39.1 IN38.3 OUT38.3 RGB38.1
VCC39: C40.1 IN39.3 OUT39.3 RGB39.1
VCC40: C41.1 IN40.3 OUT40.3 RGB40.1
VCC41: C42.1 IN41.3 OUT41.3 RGB41.1
VCC42: C43.1 IN42.3 OUT42.3 RGB42.1
VCC43: C44.1 IN43.3 OUT43.3 RGB43.1
VCC44: C45.1 IN44.3 OUT44.3 RGB44.1
VCC45: C46.1 IN45.3 OUT45.3 RGB45.1
VCC46: C47.1 IN46.3 OUT46.3 RGB46.1
VCC47: C48.1 IN47.3 OUT47.3 RGB47.1
VCC48: C49.1 IN48.3 OUT48.3 RGB48.1
VCC49: C50.1 IN49.3 OUT49.3 RGB49.1
VCC50: C51.1 IN50.3 OUT50.3 RGB50.1
VCC51: C52.1 IN51.3 OUT51.3 RGB51.1
VCC52: C53.1 IN52.3 OUT52.3 RGB52.1
VCC53: C54.1 IN53.3 OUT53.3 RGB53.1
VCC54: C55.1 IN54.3 OUT54.3 RGB54.1
VCC55: C56.1 IN55.3 OUT55.3 RGB55.1
VCC56: C57.1 IN56.3 OUT56.3 RGB56.1
VCC57: C58.1 IN57.3 OUT57.3 RGB57.1
VCC58: C59.1 IN58.3 OUT58.3 RGB58.1
VCC59: C60.1 IN59.3 OUT59.3 RGB59.1
VCC60: C61.1 IN60.3 OUT60.3 RGB60.1
VCC61: C62.1 IN61.3 OUT61.3 RGB61.1
VCC62: C63.1 IN62.3 OUT62.3 RGB62.1
VCC63: C64.1 IN63.3 OUT63.3 RGB63.1
VCC64: C65.1 IN64.3 OUT64.3 RGB64.1
VCC65: C66.1 IN65.3 OUT65.3 RGB65.1
VCC66: C67.1 IN66.3 OUT66.3 RGB66.1
VCC67: C68.1 IN67.3 OUT67.3 RGB67.1
VCC68: C69.1 IN68.3 OUT68.3 RGB68.1
VCC69: C70.1 IN69.3 OUT69.3 RGB69.1
VCC70: C71.1 IN70.3 OUT70.3 RGB70.1
VCC71: C72.1 IN71.3 OUT71.3 RGB71.1

## Tracks (layer width: path | path; a pad name or v marks a point on that pad's centre or on a via)
DI
  Top 0.406: RGB.4 11.15,2.92 6.16,2.92 IN.2
DI1
  Top 0.406: RGB1.4 11.15,11.24 6.16,11.24 IN1.2
DI2
  Top 0.406: RGB2.4 11.15,19.56 6.16,19.56 IN2.2
DI3
  Top 0.406: RGB3.4 11.15,27.88 6.16,27.88 IN3.2
DI4
  Top 0.406: RGB4.4 11.15,36.2 6.16,36.2 IN4.2
DI5
  Top 0.406: RGB5.4 11.15,44.52 6.16,44.52 IN5.2
DI6
  Top 0.406: RGB6.4 11.15,52.84 6.16,52.84 IN6.2
DI7
  Top 0.406: RGB7.4 11.15,61.16 6.16,61.16 IN7.2
DI8
  Top 0.406: RGB8.4 11.15,69.48 6.16,69.48 IN8.2
DI9
  Top 0.406: RGB9.4 11.15,77.8 6.16,77.8 IN9.2
DI10
  Top 0.406: RGB10.4 11.15,86.12 6.16,86.12 IN10.2
DI11
  Top 0.406: RGB11.4 11.15,94.44 6.16,94.44 IN11.2
DI12
  Top 0.406: RGB12.4 24.55,2.92 19.56,2.92 IN12.2
DI13
  Top 0.406: RGB13.4 24.55,11.24 19.56,11.24 IN13.2
DI14
  Top 0.406: RGB14.4 24.55,19.56 19.56,19.56 IN14.2
DI15
  Top 0.406: RGB15.4 24.55,27.88 19.56,27.88 IN15.2
DI16
  Top 0.406: RGB16.4 24.55,36.2 19.56,36.2 IN16.2
DI17
  Top 0.406: RGB17.4 24.55,44.52 19.56,44.52 IN17.2
DI18
  Top 0.406: RGB18.4 24.55,52.84 19.56,52.84 IN18.2
DI19
  Top 0.406: RGB19.4 24.55,61.16 19.56,61.16 IN19.2
DI20
  Top 0.406: RGB20.4 24.55,69.48 19.56,69.48 IN20.2
DI21
  Top 0.406: RGB21.4 24.55,77.8 19.56,77.8 IN21.2
DI22
  Top 0.406: RGB22.4 24.55,86.12 19.56,86.12 IN22.2
DI23
  Top 0.406: RGB23.4 24.55,94.44 19.56,94.44 IN23.2
DI24
  Top 0.406: RGB24.4 37.95,2.92 32.96,2.92 IN24.2
DI25
  Top 0.406: RGB25.4 37.95,11.24 32.96,11.24 IN25.2
DI26
  Top 0.406: RGB26.4 37.95,19.56 32.96,19.56 IN26.2
DI27
  Top 0.406: RGB27.4 37.95,27.88 32.96,27.88 IN27.2
DI28
  Top 0.406: RGB28.4 37.95,36.2 32.96,36.2 IN28.2
DI29
  Top 0.406: RGB29.4 37.95,44.52 32.96,44.52 IN29.2
DI30
  Top 0.406: RGB30.4 37.95,52.84 32.96,52.84 IN30.2
DI31
  Top 0.406: RGB31.4 37.95,61.16 32.96,61.16 IN31.2
DI32
  Top 0.406: RGB32.4 37.95,69.48 32.96,69.48 IN32.2
DI33
  Top 0.406: RGB33.4 37.95,77.8 32.96,77.8 IN33.2
DI34
  Top 0.406: RGB34.4 37.95,86.12 32.96,86.12 IN34.2
DI35
  Top 0.406: RGB35.4 37.95,94.44 32.96,94.44 IN35.2
DI36
  Top 0.406: RGB36.4 51.35,2.92 46.36,2.92 IN36.2
DI37
  Top 0.406: RGB37.4 51.35,11.24 46.36,11.24 IN37.2
DI38
  Top 0.406: RGB38.4 51.35,19.56 46.36,19.56 IN38.2
DI39
  Top 0.406: RGB39.4 51.35,27.88 46.36,27.88 IN39.2
DI40
  Top 0.406: RGB40.4 51.35,36.2 46.36,36.2 IN40.2
DI41
  Top 0.406: RGB41.4 51.35,44.52 46.36,44.52 IN41.2
DI42
  Top 0.406: RGB42.4 51.35,52.84 46.36,52.84 IN42.2
DI43
  Top 0.406: RGB43.4 51.35,61.16 46.36,61.16 IN43.2
DI44
  Top 0.406: RGB44.4 51.35,69.48 46.36,69.48 IN44.2
DI45
  Top 0.406: RGB45.4 51.35,77.8 46.36,77.8 IN45.2
DI46
  Top 0.406: RGB46.4 51.35,86.12 46.36,86.12 IN46.2
DI47
  Top 0.406: RGB47.4 51.35,94.44 46.36,94.44 IN47.2
DI48
  Top 0.406: RGB48.4 64.75,2.92 59.76,2.92 IN48.2
DI49
  Top 0.406: RGB49.4 64.75,11.24 59.76,11.24 IN49.2
DI50
  Top 0.406: RGB50.4 64.75,19.56 59.76,19.56 IN50.2
DI51
  Top 0.406: RGB51.4 64.75,27.88 59.76,27.88 IN51.2
DI52
  Top 0.406: RGB52.4 64.75,36.2 59.76,36.2 IN52.2
DI53
  Top 0.406: RGB53.4 64.75,44.52 59.76,44.52 IN53.2
DI54
  Top 0.406: RGB54.4 64.75,52.84 59.76,52.84 IN54.2
DI55
  Top 0.406: RGB55.4 64.75,61.16 59.76,61.16 IN55.2
DI56
  Top 0.406: RGB56.4 64.75,69.48 59.76,69.48 IN56.2
DI57
  Top 0.406: RGB57.4 64.75,77.8 59.76,77.8 IN57.2
DI58
  Top 0.406: RGB58.4 64.75,86.12 59.76,86.12 IN58.2
DI59
  Top 0.406: RGB59.4 64.75,94.44 59.76,94.44 IN59.2
DI60
  Top 0.406: RGB60.4 78.15,2.92 73.16,2.92 IN60.2
DI61
  Top 0.406: RGB61.4 78.15,11.24 73.16,11.24 IN61.2
DI62
  Top 0.406: RGB62.4 78.15,19.56 73.16,19.56 IN62.2
DI63
  Top 0.406: RGB63.4 78.15,27.88 73.16,27.88 IN63.2
DI64
  Top 0.406: RGB64.4 78.15,36.2 73.16,36.2 IN64.2
DI65
  Top 0.406: RGB65.4 78.15,44.52 73.16,44.52 IN65.2
DI66
  Top 0.406: RGB66.4 78.15,52.84 73.16,52.84 IN66.2
DI67
  Top 0.406: RGB67.4 78.15,61.16 73.16,61.16 IN67.2
DI68
  Top 0.406: RGB68.4 78.15,69.48 73.16,69.48 IN68.2
DI69
  Top 0.406: RGB69.4 78.15,77.8 73.16,77.8 IN69.2
DI70
  Top 0.406: RGB70.4 78.15,86.12 73.16,86.12 IN70.2
DI71
  Top 0.406: RGB71.4 78.15,94.44 73.16,94.44 IN71.2
DO
  Top 0.406: RGB.2 11.97,3.81 OUT.2
DO1
  Top 0.406: RGB1.2 11.97,12.13 OUT1.2
DO2
  Top 0.406: RGB2.2 11.97,20.45 OUT2.2
DO3
  Top 0.406: RGB3.2 11.97,28.77 OUT3.2
DO4
  Top 0.406: RGB4.2 11.97,37.09 OUT4.2
DO5
  Top 0.406: RGB5.2 11.97,45.41 OUT5.2
DO6
  Top 0.406: RGB6.2 11.97,53.73 OUT6.2
DO7
  Top 0.406: RGB7.2 11.97,62.05 OUT7.2
DO8
  Top 0.406: RGB8.2 11.97,70.37 OUT8.2
DO9
  Top 0.406: RGB9.2 11.97,78.69 OUT9.2
DO10
  Top 0.406: RGB10.2 11.97,87.01 OUT10.2
DO11
  Top 0.406: RGB11.2 11.97,95.33 OUT11.2
DO12
  Top 0.406: RGB12.2 25.37,3.81 OUT12.2
DO13
  Top 0.406: RGB13.2 25.37,12.13 OUT13.2
DO14
  Top 0.406: RGB14.2 25.37,20.45 OUT14.2
DO15
  Top 0.406: RGB15.2 25.37,28.77 OUT15.2
DO16
  Top 0.406: RGB16.2 25.37,37.09 OUT16.2
DO17
  Top 0.406: RGB17.2 25.37,45.41 OUT17.2
DO18
  Top 0.406: RGB18.2 25.37,53.73 OUT18.2
DO19
  Top 0.406: RGB19.2 25.37,62.05 OUT19.2
DO20
  Top 0.406: RGB20.2 25.37,70.37 OUT20.2
DO21
  Top 0.406: RGB21.2 25.37,78.69 OUT21.2
DO22
  Top 0.406: RGB22.2 25.37,87.01 OUT22.2
DO23
  Top 0.406: RGB23.2 25.37,95.33 OUT23.2
DO24
  Top 0.406: RGB24.2 38.77,3.81 OUT24.2
DO25
  Top 0.406: RGB25.2 38.77,12.13 OUT25.2
DO26
  Top 0.406: RGB26.2 38.77,20.45 OUT26.2
DO27
  Top 0.406: RGB27.2 38.77,28.77 OUT27.2
DO28
  Top 0.406: RGB28.2 38.77,37.09 OUT28.2
DO29
  Top 0.406: RGB29.2 38.77,45.41 OUT29.2
DO30
  Top 0.406: RGB30.2 38.77,53.73 OUT30.2
DO31
  Top 0.406: RGB31.2 38.77,62.05 OUT31.2
DO32
  Top 0.406: RGB32.2 38.77,70.37 OUT32.2
DO33
  Top 0.406: RGB33.2 38.77,78.69 OUT33.2
DO34
  Top 0.406: RGB34.2 38.77,87.01 OUT34.2
DO35
  Top 0.406: RGB35.2 38.77,95.33 OUT35.2
DO36
  Top 0.406: RGB36.2 52.17,3.81 OUT36.2
DO37
  Top 0.406: RGB37.2 52.17,12.13 OUT37.2
DO38
  Top 0.406: RGB38.2 52.17,20.45 OUT38.2
DO39
  Top 0.406: RGB39.2 52.17,28.77 OUT39.2
DO40
  Top 0.406: RGB40.2 52.17,37.09 OUT40.2
DO41
  Top 0.406: RGB41.2 52.17,45.41 OUT41.2
DO42
  Top 0.406: RGB42.2 52.17,53.73 OUT42.2
DO43
  Top 0.406: RGB43.2 52.17,62.05 OUT43.2
DO44
  Top 0.406: RGB44.2 52.17,70.37 OUT44.2
DO45
  Top 0.406: RGB45.2 52.17,78.69 OUT45.2
DO46
  Top 0.406: RGB46.2 52.17,87.01 OUT46.2
DO47
  Top 0.406: RGB47.2 52.17,95.33 OUT47.2
DO48
  Top 0.406: RGB48.2 65.57,3.81 OUT48.2
DO49
  Top 0.406: RGB49.2 65.57,12.13 OUT49.2
DO50
  Top 0.406: RGB50.2 65.57,20.45 OUT50.2
DO51
  Top 0.406: RGB51.2 65.57,28.77 OUT51.2
DO52
  Top 0.406: RGB52.2 65.57,37.09 OUT52.2
DO53
  Top 0.406: RGB53.2 65.57,45.41 OUT53.2
DO54
  Top 0.406: RGB54.2 65.57,53.73 OUT54.2
DO55
  Top 0.406: RGB55.2 65.57,62.05 OUT55.2
DO56
  Top 0.406: RGB56.2 65.57,70.37 OUT56.2
DO57
  Top 0.406: RGB57.2 65.57,78.69 OUT57.2
DO58
  Top 0.406: RGB58.2 65.57,87.01 OUT58.2
DO59
  Top 0.406: RGB59.2 65.57,95.33 OUT59.2
DO60
  Top 0.406: RGB60.2 78.97,3.81 OUT60.2
DO61
  Top 0.406: RGB61.2 78.97,12.13 OUT61.2
DO62
  Top 0.406: RGB62.2 78.97,20.45 OUT62.2
DO63
  Top 0.406: RGB63.2 78.97,28.77 OUT63.2
DO64
  Top 0.406: RGB64.2 78.97,37.09 OUT64.2
DO65
  Top 0.406: RGB65.2 78.97,45.41 OUT65.2
DO66
  Top 0.406: RGB66.2 78.97,53.73 OUT66.2
DO67
  Top 0.406: RGB67.2 78.97,62.05 OUT67.2
DO68
  Top 0.406: RGB68.2 78.97,70.37 OUT68.2
DO69
  Top 0.406: RGB69.2 78.97,78.69 OUT69.2
DO70
  Top 0.406: RGB70.2 78.97,87.01 OUT70.2
DO71
  Top 0.406: RGB71.2 78.97,95.33 OUT71.2
GND
  pour Top: 4,7.62 16.7,7.62 16.7,0 4,0
  pour Bottom: 4,7.62 16.7,7.62 16.7,0 4,0
GND1
  pour Top: 4,15.94 16.7,15.94 16.7,8.32 4,8.32
  pour Bottom: 4,15.94 16.7,15.94 16.7,8.32 4,8.32
GND2
  pour Top: 4,24.26 16.7,24.26 16.7,16.64 4,16.64
  pour Bottom: 4,24.26 16.7,24.26 16.7,16.64 4,16.64
GND3
  pour Top: 4,32.58 16.7,32.58 16.7,24.96 4,24.96
  pour Bottom: 4,32.58 16.7,32.58 16.7,24.96 4,24.96
GND4
  pour Top: 4,40.9 16.7,40.9 16.7,33.28 4,33.28
  pour Bottom: 4,40.9 16.7,40.9 16.7,33.28 4,33.28
GND5
  pour Top: 4,49.22 16.7,49.22 16.7,41.6 4,41.6
  pour Bottom: 4,49.22 16.7,49.22 16.7,41.6 4,41.6
GND6
  pour Top: 4,57.54 16.7,57.54 16.7,49.92 4,49.92
  pour Bottom: 4,57.54 16.7,57.54 16.7,49.92 4,49.92
GND7
  pour Top: 4,65.86 16.7,65.86 16.7,58.24 4,58.24
  pour Bottom: 4,65.86 16.7,65.86 16.7,58.24 4,58.24
GND8
  pour Top: 4,74.18 16.7,74.18 16.7,66.56 4,66.56
  pour Bottom: 4,74.18 16.7,74.18 16.7,66.56 4,66.56
GND9
  pour Top: 4,82.5 16.7,82.5 16.7,74.88 4,74.88
  pour Bottom: 4,82.5 16.7,82.5 16.7,74.88 4,74.88
GND10
  pour Top: 4,90.82 16.7,90.82 16.7,83.2 4,83.2
  pour Bottom: 4,90.82 16.7,90.82 16.7,83.2 4,83.2
GND11
  pour Top: 4,99.14 16.7,99.14 16.7,91.52 4,91.52
  pour Bottom: 4,99.14 16.7,99.14 16.7,91.52 4,91.52
GND12
  pour Top: 17.4,7.62 30.1,7.62 30.1,0 17.4,0
  pour Bottom: 17.4,7.62 30.1,7.62 30.1,0 17.4,0
GND13
  pour Top: 17.4,15.94 30.1,15.94 30.1,8.32 17.4,8.32
  pour Bottom: 17.4,15.94 30.1,15.94 30.1,8.32 17.4,8.32
GND14
  pour Top: 17.4,24.26 30.1,24.26 30.1,16.64 17.4,16.64
  pour Bottom: 17.4,24.26 30.1,24.26 30.1,16.64 17.4,16.64
GND15
  pour Top: 17.4,32.58 30.1,32.58 30.1,24.96 17.4,24.96
  pour Bottom: 17.4,32.58 30.1,32.58 30.1,24.96 17.4,24.96
GND16
  pour Top: 17.4,40.9 30.1,40.9 30.1,33.28 17.4,33.28
  pour Bottom: 17.4,40.9 30.1,40.9 30.1,33.28 17.4,33.28
GND17
  pour Top: 17.4,49.22 30.1,49.22 30.1,41.6 17.4,41.6
  pour Bottom: 17.4,49.22 30.1,49.22 30.1,41.6 17.4,41.6
GND18
  pour Top: 17.4,57.54 30.1,57.54 30.1,49.92 17.4,49.92
  pour Bottom: 17.4,57.54 30.1,57.54 30.1,49.92 17.4,49.92
GND19
  pour Top: 17.4,65.86 30.1,65.86 30.1,58.24 17.4,58.24
  pour Bottom: 17.4,65.86 30.1,65.86 30.1,58.24 17.4,58.24
GND20
  pour Top: 17.4,74.18 30.1,74.18 30.1,66.56 17.4,66.56
  pour Bottom: 17.4,74.18 30.1,74.18 30.1,66.56 17.4,66.56
GND21
  pour Top: 17.4,82.5 30.1,82.5 30.1,74.88 17.4,74.88
  pour Bottom: 17.4,82.5 30.1,82.5 30.1,74.88 17.4,74.88
GND22
  pour Top: 17.4,90.82 30.1,90.82 30.1,83.2 17.4,83.2
  pour Bottom: 17.4,90.82 30.1,90.82 30.1,83.2 17.4,83.2
GND23
  pour Top: 17.4,99.14 30.1,99.14 30.1,91.52 17.4,91.52
  pour Bottom: 17.4,99.14 30.1,99.14 30.1,91.52 17.4,91.52
GND24
  pour Top: 30.8,7.62 43.5,7.62 43.5,0 30.8,0
  pour Bottom: 30.8,7.62 43.5,7.62 43.5,0 30.8,0
GND25
  pour Top: 30.8,15.94 43.5,15.94 43.5,8.32 30.8,8.32
  pour Bottom: 30.8,15.94 43.5,15.94 43.5,8.32 30.8,8.32
GND26
  pour Top: 30.8,24.26 43.5,24.26 43.5,16.64 30.8,16.64
  pour Bottom: 30.8,24.26 43.5,24.26 43.5,16.64 30.8,16.64
GND27
  pour Top: 30.8,32.58 43.5,32.58 43.5,24.96 30.8,24.96
  pour Bottom: 30.8,32.58 43.5,32.58 43.5,24.96 30.8,24.96
GND28
  pour Top: 30.8,40.9 43.5,40.9 43.5,33.28 30.8,33.28
  pour Bottom: 30.8,40.9 43.5,40.9 43.5,33.28 30.8,33.28
GND29
  pour Top: 30.8,49.22 43.5,49.22 43.5,41.6 30.8,41.6
  pour Bottom: 30.8,49.22 43.5,49.22 43.5,41.6 30.8,41.6
GND30
  pour Top: 30.8,57.54 43.5,57.54 43.5,49.92 30.8,49.92
  pour Bottom: 30.8,57.54 43.5,57.54 43.5,49.92 30.8,49.92
GND31
  pour Top: 30.8,65.86 43.5,65.86 43.5,58.24 30.8,58.24
  pour Bottom: 30.8,65.86 43.5,65.86 43.5,58.24 30.8,58.24
GND32
  pour Top: 30.8,74.18 43.5,74.18 43.5,66.56 30.8,66.56
  pour Bottom: 30.8,74.18 43.5,74.18 43.5,66.56 30.8,66.56
GND33
  pour Top: 30.8,82.5 43.5,82.5 43.5,74.88 30.8,74.88
  pour Bottom: 30.8,82.5 43.5,82.5 43.5,74.88 30.8,74.88
GND34
  pour Top: 30.8,90.82 43.5,90.82 43.5,83.2 30.8,83.2
  pour Bottom: 30.8,90.82 43.5,90.82 43.5,83.2 30.8,83.2
GND35
  pour Top: 30.8,99.14 43.5,99.14 43.5,91.52 30.8,91.52
  pour Bottom: 30.8,99.14 43.5,99.14 43.5,91.52 30.8,91.52
GND36
  pour Top: 44.2,7.62 56.9,7.62 56.9,0 44.2,0
  pour Bottom: 44.2,7.62 56.9,7.62 56.9,0 44.2,0
GND37
  pour Top: 44.2,15.94 56.9,15.94 56.9,8.32 44.2,8.32
  pour Bottom: 44.2,15.94 56.9,15.94 56.9,8.32 44.2,8.32
GND38
  pour Top: 44.2,24.26 56.9,24.26 56.9,16.64 44.2,16.64
  pour Bottom: 44.2,24.26 56.9,24.26 56.9,16.64 44.2,16.64
GND39
  pour Top: 44.2,32.58 56.9,32.58 56.9,24.96 44.2,24.96
  pour Bottom: 44.2,32.58 56.9,32.58 56.9,24.96 44.2,24.96
GND40
  pour Top: 44.2,40.9 56.9,40.9 56.9,33.28 44.2,33.28
  pour Bottom: 44.2,40.9 56.9,40.9 56.9,33.28 44.2,33.28
GND41
  pour Top: 44.2,49.22 56.9,49.22 56.9,41.6 44.2,41.6
  pour Bottom: 44.2,49.22 56.9,49.22 56.9,41.6 44.2,41.6
GND42
  pour Top: 44.2,57.54 56.9,57.54 56.9,49.92 44.2,49.92
  pour Bottom: 44.2,57.54 56.9,57.54 56.9,49.92 44.2,49.92
GND43
  pour Top: 44.2,65.86 56.9,65.86 56.9,58.24 44.2,58.24
  pour Bottom: 44.2,65.86 56.9,65.86 56.9,58.24 44.2,58.24
GND44
  pour Top: 44.2,74.18 56.9,74.18 56.9,66.56 44.2,66.56
  pour Bottom: 44.2,74.18 56.9,74.18 56.9,66.56 44.2,66.56
GND45
  pour Top: 44.2,82.5 56.9,82.5 56.9,74.88 44.2,74.88
  pour Bottom: 44.2,82.5 56.9,82.5 56.9,74.88 44.2,74.88
GND46
  pour Top: 44.2,90.82 56.9,90.82 56.9,83.2 44.2,83.2
  pour Bottom: 44.2,90.82 56.9,90.82 56.9,83.2 44.2,83.2
GND47
  pour Top: 44.2,99.14 56.9,99.14 56.9,91.52 44.2,91.52
  pour Bottom: 44.2,99.14 56.9,99.14 56.9,91.52 44.2,91.52
GND48
  pour Top: 57.6,7.62 70.3,7.62 70.3,0 57.6,0
  pour Bottom: 57.6,7.62 70.3,7.62 70.3,0 57.6,0
GND49
  pour Top: 57.6,15.94 70.3,15.94 70.3,8.32 57.6,8.32
  pour Bottom: 57.6,15.94 70.3,15.94 70.3,8.32 57.6,8.32
GND50
  pour Top: 57.6,24.26 70.3,24.26 70.3,16.64 57.6,16.64
  pour Bottom: 57.6,24.26 70.3,24.26 70.3,16.64 57.6,16.64
GND51
  pour Top: 57.6,32.58 70.3,32.58 70.3,24.96 57.6,24.96
  pour Bottom: 57.6,32.58 70.3,32.58 70.3,24.96 57.6,24.96
GND52
  pour Top: 57.6,40.9 70.3,40.9 70.3,33.28 57.6,33.28
  pour Bottom: 57.6,40.9 70.3,40.9 70.3,33.28 57.6,33.28
GND53
  pour Top: 57.6,49.22 70.3,49.22 70.3,41.6 57.6,41.6
  pour Bottom: 57.6,49.22 70.3,49.22 70.3,41.6 57.6,41.6
GND54
  pour Top: 57.6,57.54 70.3,57.54 70.3,49.92 57.6,49.92
  pour Bottom: 57.6,57.54 70.3,57.54 70.3,49.92 57.6,49.92
GND55
  pour Top: 57.6,65.86 70.3,65.86 70.3,58.24 57.6,58.24
  pour Bottom: 57.6,65.86 70.3,65.86 70.3,58.24 57.6,58.24
GND56
  pour Top: 57.6,74.18 70.3,74.18 70.3,66.56 57.6,66.56
  pour Bottom: 57.6,74.18 70.3,74.18 70.3,66.56 57.6,66.56
GND57
  pour Top: 57.6,82.5 70.3,82.5 70.3,74.88 57.6,74.88
  pour Bottom: 57.6,82.5 70.3,82.5 70.3,74.88 57.6,74.88
GND58
  pour Top: 57.6,90.82 70.3,90.82 70.3,83.2 57.6,83.2
  pour Bottom: 57.6,90.82 70.3,90.82 70.3,83.2 57.6,83.2
GND59
  pour Top: 57.6,99.14 70.3,99.14 70.3,91.52 57.6,91.52
  pour Bottom: 57.6,99.14 70.3,99.14 70.3,91.52 57.6,91.52
GND60
  pour Top: 71,7.62 83.7,7.62 83.7,0 71,0
  pour Bottom: 71,7.62 83.7,7.62 83.7,0 71,0
GND61
  pour Top: 71,15.94 83.7,15.94 83.7,8.32 71,8.32
  pour Bottom: 71,15.94 83.7,15.94 83.7,8.32 71,8.32
GND62
  pour Top: 71,24.26 83.7,24.26 83.7,16.64 71,16.64
  pour Bottom: 71,24.26 83.7,24.26 83.7,16.64 71,16.64
GND63
  pour Top: 71,32.58 83.7,32.58 83.7,24.96 71,24.96
  pour Bottom: 71,32.58 83.7,32.58 83.7,24.96 71,24.96
GND64
  pour Top: 71,40.9 83.7,40.9 83.7,33.28 71,33.28
  pour Bottom: 71,40.9 83.7,40.9 83.7,33.28 71,33.28
GND65
  pour Top: 71,49.22 83.7,49.22 83.7,41.6 71,41.6
  pour Bottom: 71,49.22 83.7,49.22 83.7,41.6 71,41.6
GND66
  pour Top: 71,57.54 83.7,57.54 83.7,49.92 71,49.92
  pour Bottom: 71,57.54 83.7,57.54 83.7,49.92 71,49.92
GND67
  pour Top: 71,65.86 83.7,65.86 83.7,58.24 71,58.24
  pour Bottom: 71,65.86 83.7,65.86 83.7,58.24 71,58.24
GND68
  pour Top: 71,74.18 83.7,74.18 83.7,66.56 71,66.56
  pour Bottom: 71,74.18 83.7,74.18 83.7,66.56 71,66.56
GND69
  pour Top: 71,82.5 83.7,82.5 83.7,74.88 71,74.88
  pour Bottom: 71,82.5 83.7,82.5 83.7,74.88 71,74.88
GND70
  pour Top: 71,90.82 83.7,90.82 83.7,83.2 71,83.2
  pour Bottom: 71,90.82 83.7,90.82 83.7,83.2 71,83.2
GND71
  pour Top: 71,99.14 83.7,99.14 83.7,91.52 71,91.52
  pour Bottom: 71,99.14 83.7,99.14 83.7,91.52 71,91.52
VCC
  Top 0.813: RGB.1 12.8,6.35 OUT.3 | C1.1 6.04,6.35 IN.3
  Bottom 0.813: OUT.3 IN.3
VCC1
  Top 0.813: RGB1.1 12.8,14.67 OUT1.3 | C2.1 6.04,14.67 IN1.3
  Bottom 0.813: OUT1.3 IN1.3
VCC2
  Top 0.813: RGB2.1 12.8,22.99 OUT2.3 | C3.1 6.04,22.99 IN2.3
  Bottom 0.813: OUT2.3 IN2.3
VCC3
  Top 0.813: RGB3.1 12.8,31.31 OUT3.3 | C4.1 6.04,31.31 IN3.3
  Bottom 0.813: OUT3.3 IN3.3
VCC4
  Top 0.813: RGB4.1 12.8,39.63 OUT4.3 | C5.1 6.04,39.63 IN4.3
  Bottom 0.813: OUT4.3 IN4.3
VCC5
  Top 0.813: RGB5.1 12.8,47.95 OUT5.3 | C6.1 6.04,47.95 IN5.3
  Bottom 0.813: OUT5.3 IN5.3
VCC6
  Top 0.813: RGB6.1 12.8,56.27 OUT6.3 | C7.1 6.04,56.27 IN6.3
  Bottom 0.813: OUT6.3 IN6.3
VCC7
  Top 0.813: RGB7.1 12.8,64.59 OUT7.3 | C8.1 6.04,64.59 IN7.3
  Bottom 0.813: OUT7.3 IN7.3
VCC8
  Top 0.813: RGB8.1 12.8,72.91 OUT8.3 | C9.1 6.04,72.91 IN8.3
  Bottom 0.813: OUT8.3 IN8.3
VCC9
  Top 0.813: RGB9.1 12.8,81.23 OUT9.3 | C10.1 6.04,81.23 IN9.3
  Bottom 0.813: OUT9.3 IN9.3
VCC10
  Top 0.813: RGB10.1 12.8,89.55 OUT10.3 | C11.1 6.04,89.55 IN10.3
  Bottom 0.813: OUT10.3 IN10.3
VCC11
  Top 0.813: RGB11.1 12.8,97.87 OUT11.3 | C12.1 6.04,97.87 IN11.3
  Bottom 0.813: OUT11.3 IN11.3
VCC12
  Top 0.813: RGB12.1 26.2,6.35 OUT12.3 | C13.1 19.44,6.35 IN12.3
  Bottom 0.813: OUT12.3 IN12.3
VCC13
  Top 0.813: RGB13.1 26.2,14.67 OUT13.3 | C14.1 19.44,14.67 IN13.3
  Bottom 0.813: OUT13.3 IN13.3
VCC14
  Top 0.813: RGB14.1 26.2,22.99 OUT14.3 | C15.1 19.44,22.99 IN14.3
  Bottom 0.813: OUT14.3 IN14.3
VCC15
  Top 0.813: RGB15.1 26.2,31.31 OUT15.3 | C16.1 19.44,31.31 IN15.3
  Bottom 0.813: OUT15.3 IN15.3
VCC16
  Top 0.813: RGB16.1 26.2,39.63 OUT16.3 | C17.1 19.44,39.63 IN16.3
  Bottom 0.813: OUT16.3 IN16.3
VCC17
  Top 0.813: RGB17.1 26.2,47.95 OUT17.3 | C18.1 19.44,47.95 IN17.3
  Bottom 0.813: OUT17.3 IN17.3
VCC18
  Top 0.813: RGB18.1 26.2,56.27 OUT18.3 | C19.1 19.44,56.27 IN18.3
  Bottom 0.813: OUT18.3 IN18.3
VCC19
  Top 0.813: RGB19.1 26.2,64.59 OUT19.3 | C20.1 19.44,64.59 IN19.3
  Bottom 0.813: OUT19.3 IN19.3
VCC20
  Top 0.813: RGB20.1 26.2,72.91 OUT20.3 | C21.1 19.44,72.91 IN20.3
  Bottom 0.813: OUT20.3 IN20.3
VCC21
  Top 0.813: RGB21.1 26.2,81.23 OUT21.3 | C22.1 19.44,81.23 IN21.3
  Bottom 0.813: OUT21.3 IN21.3
VCC22
  Top 0.813: RGB22.1 26.2,89.55 OUT22.3 | C23.1 19.44,89.55 IN22.3
  Bottom 0.813: OUT22.3 IN22.3
VCC23
  Top 0.813: RGB23.1 26.2,97.87 OUT23.3 | C24.1 19.44,97.87 IN23.3
  Bottom 0.813: OUT23.3 IN23.3
VCC24
  Top 0.813: RGB24.1 39.6,6.35 OUT24.3 | C25.1 32.84,6.35 IN24.3
  Bottom 0.813: OUT24.3 IN24.3
VCC25
  Top 0.813: RGB25.1 39.6,14.67 OUT25.3 | C26.1 32.84,14.67 IN25.3
  Bottom 0.813: OUT25.3 IN25.3
VCC26
  Top 0.813: RGB26.1 39.6,22.99 OUT26.3 | C27.1 32.84,22.99 IN26.3
  Bottom 0.813: OUT26.3 IN26.3
VCC27
  Top 0.813: RGB27.1 39.6,31.31 OUT27.3 | C28.1 32.84,31.31 IN27.3
  Bottom 0.813: OUT27.3 IN27.3
VCC28
  Top 0.813: RGB28.1 39.6,39.63 OUT28.3 | C29.1 32.84,39.63 IN28.3
  Bottom 0.813: OUT28.3 IN28.3
VCC29
  Top 0.813: RGB29.1 39.6,47.95 OUT29.3 | C30.1 32.84,47.95 IN29.3
  Bottom 0.813: OUT29.3 IN29.3
VCC30
  Top 0.813: RGB30.1 39.6,56.27 OUT30.3 | C31.1 32.84,56.27 IN30.3
  Bottom 0.813: OUT30.3 IN30.3
VCC31
  Top 0.813: RGB31.1 39.6,64.59 OUT31.3 | C32.1 32.84,64.59 IN31.3
  Bottom 0.813: OUT31.3 IN31.3
VCC32
  Top 0.813: RGB32.1 39.6,72.91 OUT32.3 | C33.1 32.84,72.91 IN32.3
  Bottom 0.813: OUT32.3 IN32.3
VCC33
  Top 0.813: RGB33.1 39.6,81.23 OUT33.3 | C34.1 32.84,81.23 IN33.3
  Bottom 0.813: OUT33.3 IN33.3
VCC34
  Top 0.813: RGB34.1 39.6,89.55 OUT34.3 | C35.1 32.84,89.55 IN34.3
  Bottom 0.813: OUT34.3 IN34.3
VCC35
  Top 0.813: RGB35.1 39.6,97.87 OUT35.3 | C36.1 32.84,97.87 IN35.3
  Bottom 0.813: OUT35.3 IN35.3
VCC36
  Top 0.813: RGB36.1 53,6.35 OUT36.3 | C37.1 46.24,6.35 IN36.3
  Bottom 0.813: OUT36.3 IN36.3
VCC37
  Top 0.813: RGB37.1 53,14.67 OUT37.3 | C38.1 46.24,14.67 IN37.3
  Bottom 0.813: OUT37.3 IN37.3
VCC38
  Top 0.813: RGB38.1 53,22.99 OUT38.3 | C39.1 46.24,22.99 IN38.3
  Bottom 0.813: OUT38.3 IN38.3
VCC39
  Top 0.813: RGB39.1 53,31.31 OUT39.3 | C40.1 46.24,31.31 IN39.3
  Bottom 0.813: OUT39.3 IN39.3
VCC40
  Top 0.813: RGB40.1 53,39.63 OUT40.3 | C41.1 46.24,39.63 IN40.3
  Bottom 0.813: OUT40.3 IN40.3
VCC41
  Top 0.813: RGB41.1 53,47.95 OUT41.3 | C42.1 46.24,47.95 IN41.3
  Bottom 0.813: OUT41.3 IN41.3
VCC42
  Top 0.813: RGB42.1 53,56.27 OUT42.3 | C43.1 46.24,56.27 IN42.3
  Bottom 0.813: OUT42.3 IN42.3
VCC43
  Top 0.813: RGB43.1 53,64.59 OUT43.3 | C44.1 46.24,64.59 IN43.3
  Bottom 0.813: OUT43.3 IN43.3
VCC44
  Top 0.813: RGB44.1 53,72.91 OUT44.3 | C45.1 46.24,72.91 IN44.3
  Bottom 0.813: OUT44.3 IN44.3
VCC45
  Top 0.813: RGB45.1 53,81.23 OUT45.3 | C46.1 46.24,81.23 IN45.3
  Bottom 0.813: OUT45.3 IN45.3
VCC46
  Top 0.813: RGB46.1 53,89.55 OUT46.3 | C47.1 46.24,89.55 IN46.3
  Bottom 0.813: OUT46.3 IN46.3
VCC47
  Top 0.813: RGB47.1 53,97.87 OUT47.3 | C48.1 46.24,97.87 IN47.3
  Bottom 0.813: OUT47.3 IN47.3
VCC48
  Top 0.813: RGB48.1 66.4,6.35 OUT48.3 | C49.1 59.64,6.35 IN48.3
  Bottom 0.813: OUT48.3 IN48.3
VCC49
  Top 0.813: RGB49.1 66.4,14.67 OUT49.3 | C50.1 59.64,14.67 IN49.3
  Bottom 0.813: OUT49.3 IN49.3
VCC50
  Top 0.813: RGB50.1 66.4,22.99 OUT50.3 | C51.1 59.64,22.99 IN50.3
  Bottom 0.813: OUT50.3 IN50.3
VCC51
  Top 0.813: RGB51.1 66.4,31.31 OUT51.3 | C52.1 59.64,31.31 IN51.3
  Bottom 0.813: OUT51.3 IN51.3
VCC52
  Top 0.813: RGB52.1 66.4,39.63 OUT52.3 | C53.1 59.64,39.63 IN52.3
  Bottom 0.813: OUT52.3 IN52.3
VCC53
  Top 0.813: RGB53.1 66.4,47.95 OUT53.3 | C54.1 59.64,47.95 IN53.3
  Bottom 0.813: OUT53.3 IN53.3
VCC54
  Top 0.813: RGB54.1 66.4,56.27 OUT54.3 | C55.1 59.64,56.27 IN54.3
  Bottom 0.813: OUT54.3 IN54.3
VCC55
  Top 0.813: RGB55.1 66.4,64.59 OUT55.3 | C56.1 59.64,64.59 IN55.3
  Bottom 0.813: OUT55.3 IN55.3
VCC56
  Top 0.813: RGB56.1 66.4,72.91 OUT56.3 | C57.1 59.64,72.91 IN56.3
  Bottom 0.813: OUT56.3 IN56.3
VCC57
  Top 0.813: RGB57.1 66.4,81.23 OUT57.3 | C58.1 59.64,81.23 IN57.3
  Bottom 0.813: OUT57.3 IN57.3
VCC58
  Top 0.813: RGB58.1 66.4,89.55 OUT58.3 | C59.1 59.64,89.55 IN58.3
  Bottom 0.813: OUT58.3 IN58.3
VCC59
  Top 0.813: RGB59.1 66.4,97.87 OUT59.3 | C60.1 59.64,97.87 IN59.3
  Bottom 0.813: OUT59.3 IN59.3
VCC60
  Top 0.813: RGB60.1 79.8,6.35 OUT60.3 | C61.1 73.04,6.35 IN60.3
  Bottom 0.813: OUT60.3 IN60.3
VCC61
  Top 0.813: RGB61.1 79.8,14.67 OUT61.3 | C62.1 73.04,14.67 IN61.3
  Bottom 0.813: OUT61.3 IN61.3
VCC62
  Top 0.813: RGB62.1 79.8,22.99 OUT62.3 | C63.1 73.04,22.99 IN62.3
  Bottom 0.813: OUT62.3 IN62.3
VCC63
  Top 0.813: RGB63.1 79.8,31.31 OUT63.3 | C64.1 73.04,31.31 IN63.3
  Bottom 0.813: OUT63.3 IN63.3
VCC64
  Top 0.813: RGB64.1 79.8,39.63 OUT64.3 | C65.1 73.04,39.63 IN64.3
  Bottom 0.813: OUT64.3 IN64.3
VCC65
  Top 0.813: RGB65.1 79.8,47.95 OUT65.3 | C66.1 73.04,47.95 IN65.3
  Bottom 0.813: OUT65.3 IN65.3
VCC66
  Top 0.813: RGB66.1 79.8,56.27 OUT66.3 | C67.1 73.04,56.27 IN66.3
  Bottom 0.813: OUT66.3 IN66.3
VCC67
  Top 0.813: RGB67.1 79.8,64.59 OUT67.3 | C68.1 73.04,64.59 IN67.3
  Bottom 0.813: OUT67.3 IN67.3
VCC68
  Top 0.813: RGB68.1 79.8,72.91 OUT68.3 | C69.1 73.04,72.91 IN68.3
  Bottom 0.813: OUT68.3 IN68.3
VCC69
  Top 0.813: RGB69.1 79.8,81.23 OUT69.3 | C70.1 73.04,81.23 IN69.3
  Bottom 0.813: OUT69.3 IN69.3
VCC70
  Top 0.813: RGB70.1 79.8,89.55 OUT70.3 | C71.1 73.04,89.55 IN70.3
  Bottom 0.813: OUT70.3 IN70.3
VCC71
  Top 0.813: RGB71.1 79.8,97.87 OUT71.3 | C72.1 73.04,97.87 IN71.3
  Bottom 0.813: OUT71.3 IN71.3